# EAGLE board waterproof-bike-battery-pack (EAGLE 6.2)
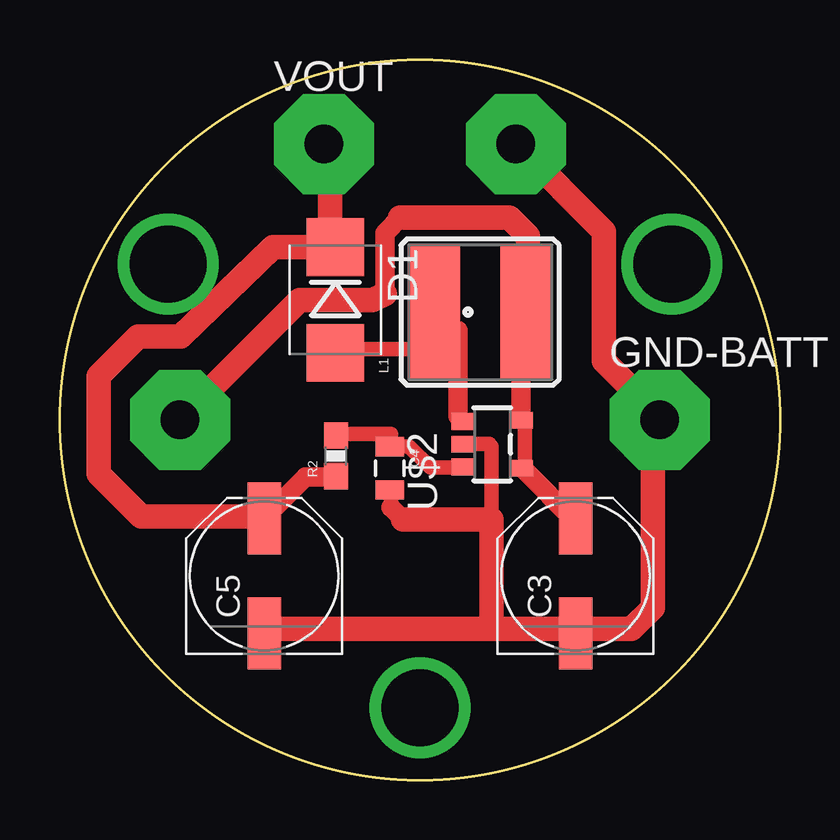
[diagram p0: board, top side]

Size 30.02 x 30.02 mm. Coordinates in mm from the lower left corner, seen from the top.
Outline: circle at 15.01,15.01 radius 15.01
Copper layers (1*16): Top 0.035mm / dielectric 1.5mm / Bottom 0.035mm
Design rules: minimum track width 24mil, minimum drill 24mil, track to track 16mil, track to pad 12mil, pad to pad 12mil, via to via 12mil, smd to smd 12mil, copper to edge 0mil, drill to drill 8mil, minimum pad ring 10mil, minimum via ring 8mil, stop-mask expansion 4mil, vias tented up to drill 0mil, thermal gap 10mil

## Footprints (pad centres in the part's own frame; a part is rotated, then mirrored left to right if it is on the bottom)
PANASONIC_D = smd 3 x 1.4: + 2.4,0; - -2.4,0
0805 = smd 0.8 x 1.2: 1 -0.9,0; 2 0.9,0
SMB-DIODE = smd 2.4 x 2.4: A 2.2,0; C -2.2,0
4,16O1,6 = drill 1.6 pad 4.166 octagon: 1 0,0
CR54 = smd 5.5 x 2.15: P$1 0,1.92; P$2 0,-1.92
0603-RES = smd 1.1 x 1: 1 -0.85,0; 2 0.85,0
SOT23-5 = smd 0.7 x 1: 1 0.95,1.2; 2 0,1.2; 3 -0.95,1.2; 4 -1,-1.2; 5 1,-1.2

## Placement (x,y rotation side)
C3  100uF  [PANASONIC_D]  21.5,8.51 90 top
C4  1uF  [0805]  13.75,13 270 top
C5  100uF  [PANASONIC_D]  8.51,8.51 90 top
D1  ZHCS2000  [SMB-DIODE]  11.48,20.01 270 top
GND-BATT  [4,16O1,6]  25.01,15.01 0 top
GND-OUT  [4,16O1,6]  19.01,26.51 0 bottom
L1  10uH  [CR54]  17.51,19.5 90 top
R2  10  [0603-RES]  11.5,13.51 90 top
U$2  SP6641B-L-5-0  [SOT23-5]  18.02,14 90 top
VBATT  [4,16O1,6]  5.01,15.01 0 bottom
VOUT  [4,16O1,6]  11.01,26.51 0 top

## Library data of the parts
C3 C5 = rcl
C4 D1 L1 R2 = SparkFun
GND-BATT GND-OUT VBATT VOUT = wirepad
U$2 = Sipex Custom

## Nets
GND: C3.- C4.2 C5.- GND-BATT.1 GND-OUT.1 U$2.2
LX: D1.A L1.P$1 U$2.1
VBATT: C3.+ L1.P$2 U$2.4 U$2.5 VBATT.1
VBOOST: C5.+ D1.C R2.1 VOUT.1
VOUT: C4.1 R2.2 U$2.3

## Tracks (layer width: path | path; a pad name or v marks a point on that pad's centre or on a via)
GND
  Top 0.406: 17.9,14 17.99,13.91
  Top 0.61: 13.8,11.37 13.8,12 C4.2 | 8.72,6.29 C5.- 8.97,6.29 | 21.42,6.29 C3.- 21.67,6.29 | 19.13,26.43 19.13,26.35 GND-OUT.1 | 24.97,15.18 GND-BATT.1 24.72,14.92 | U$2.2 17.9,14 | 17.99,13.91 17.99,10.86 | 17.99,6.42 17.48,6.29
  Top 0.813: 14.3,10.86 13.8,11.37
  Top 1.016: 8.97,6.29 17.48,6.29 21.42,6.29 | 19.13,26.43 22.69,22.87 22.69,17.46 24.97,15.18 | 21.67,6.29 23.83,6.29 24.72,7.18 24.72,14.92 | 14.3,10.86 17.99,10.86 17.99,6.42
LX
  Top 0.61: 16.59,18.73 15.83,19.5 L1.P$1 16.34,17.97 11.51,17.97 D1.A | 16.59,15.18 U$2.1
  Top 0.813: 16.59,18.73 16.59,15.18
N$1  (via drill 3.2)
  other vias: 4.51,21.51
N$2  (via drill 3.2)
  other vias: 25.51,21.51
N$3  (via drill 3.2)
  other vias: 15.01,3.01
VBATT
  Top 0.61: U$2.5 19.38,14.92 19.38,13.15 U$2.4 19.38,12.89 | 21.42,10.86 C3.+
  Top 0.813: 21.42,10.86 19.38,12.89 | U$2.5 19.22,19.29 L1.P$2 | 13.54,20.26 13.54,22.8 14.18,23.43
  Top 1.016: VBATT.1 5.01,15.03 9.99,20 13.03,20 13.54,20.26 | 14.18,23.43 18.75,23.43 19.51,22.67 19.51,19.58 L1.P$2
VBOOST
  Top 0.61: 11.26,12.64 R2.1 | 8.72,11.11 C5.+ | 11.26,22.29 D1.C | 11.26,26.35 VOUT.1
  Top 0.813: 11.26,12.64 10.24,12.64 8.72,11.11
  Top 1.016: 11.26,26.35 11.26,22.29 | D1.C 8.89,22.21 8.84,22.16 5.03,18.48 3.26,18.48 1.6,16.83 1.6,12.77 3.38,10.99 8.43,10.99 C5.+
VOUT
  Top 0.61: U$2.3 16.59,13.02 15.45,13.02 14.56,13.91 13.8,13.91 C4.1 13.8,14.42 11.51,14.42 R2.2